# Altium PCB PCB2.PcbDoc
Units mm, origin at the board's own origin, x right, y up, seen from the top; angles counter-clockwise.
Board outline 159.89 x 71.5 mm, 2 copper layers (Top Layer, Bottom Layer); 21 components, 42 nets, 178 pads, 6 vias.
Unrouted connection lines stored in the file: 71.
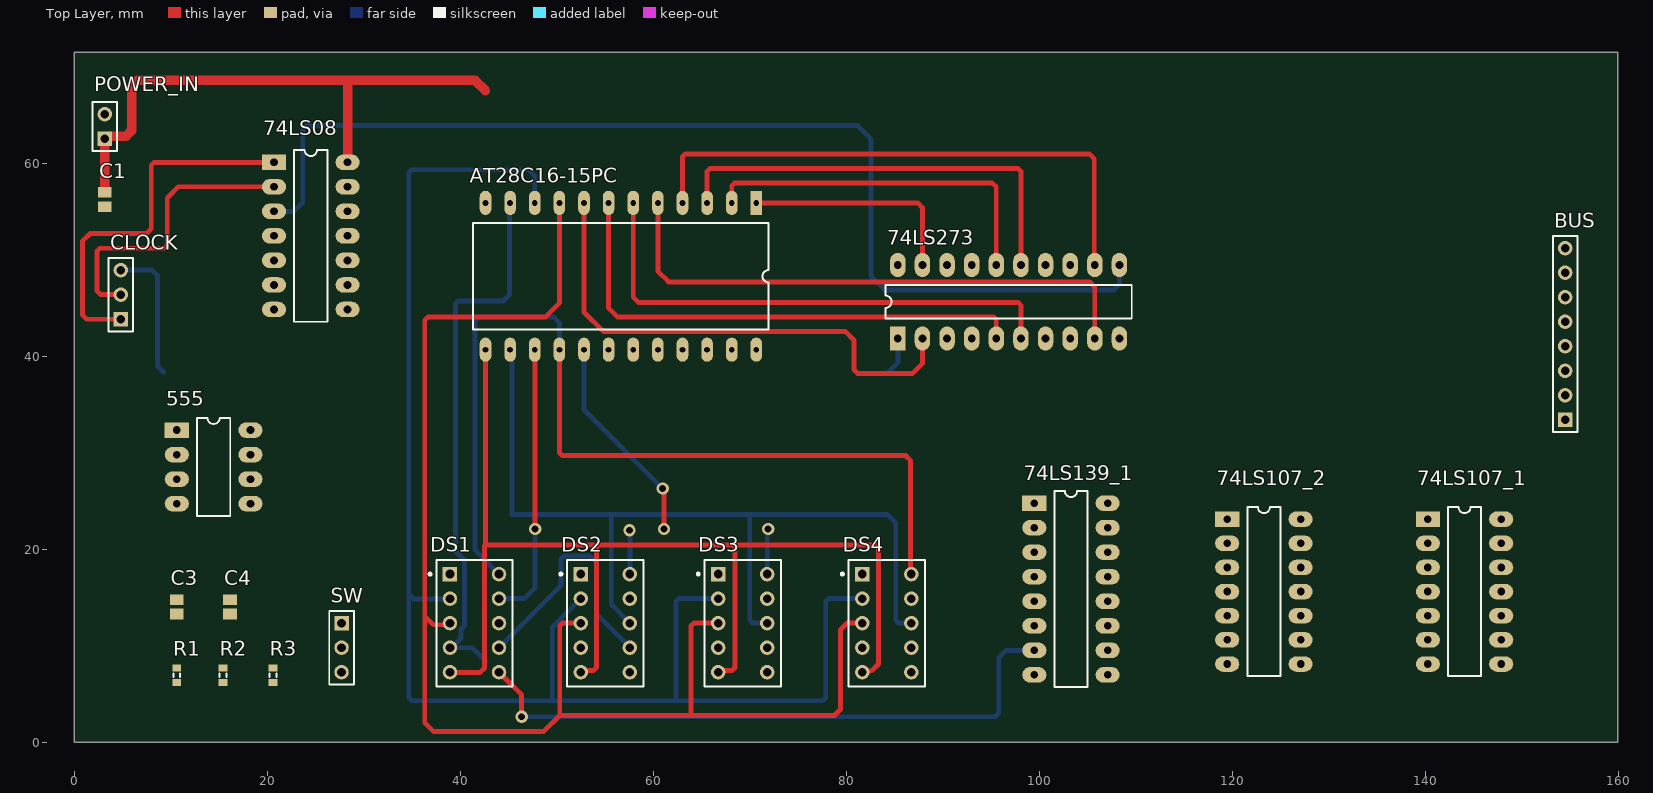
[diagram p0: Top Layer view]
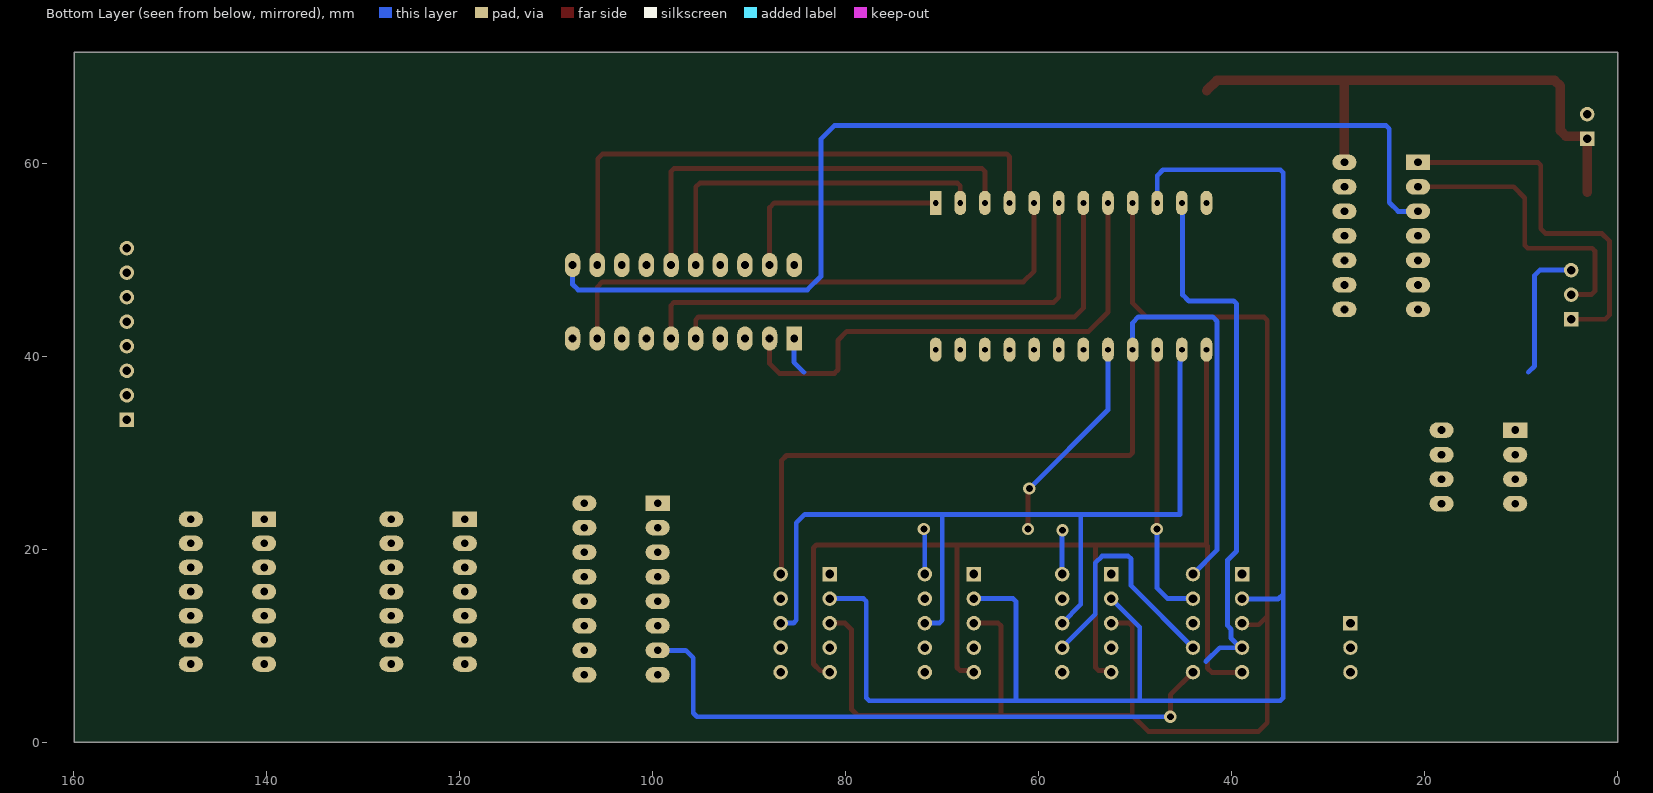
[diagram p1: Bottom Layer view, seen from below]

## Layer stack, top to bottom
Top Solder: solder mask 0.0102, Solder Resist, Dk 3.5
Top Layer: signal copper 0.0356
Dielectric 1: dielectric 0.32, FR-4, Dk 4.8
Bottom Layer: signal copper 0.0356
Bottom Solder: solder mask 0.0102, Solder Resist, Dk 3.5

## Board outline
0,0 159.893,0 159.893,71.501 0,71.501

## Design rules (kind name [scope] priority, off if disabled: settings)
Clearance [All] p1: gap=0.254 ignorepadtopadclearanceinfootprint=FALSE except(0: Arc-Hole Track-Hole SMDPad-Hole THPad-Hole Via-Hole Fill-Hole Poly-Hole Region-Hole Text-Hole; 0.245: Arc-SMDPad Track-SMDPad; 1: Arc-Arc Arc-Track Track-Track)
PolygonConnect [All] p1: connectstyle=Relief reliefconductorwidth=0.254 reliefentries=4 polygonreliefangle="90 Angle" airgapwidth=0.254
RoutingVias [All] p1: holewidth=0.711 width=1.27 viastyle="Through Hole" minholewidth=0.711 minwidth=1.27 maxholewidth=0.711 maxwidth=1.27
SolderMaskExpansion [All] p1: expansion=0.102 istentingtop=FALSE
Width VCC [InNet('VCC')] p1: maxlimit=2 minlimit=1 preferedwidth=1
Width GND [InNet('GND')] p2: maxlimit=2 minlimit=1 preferedwidth=1
Width [All] p3: maxlimit=1 minlimit=0.5 preferedwidth=0.5
30 further rules are at their usual default settings.

## Components (designator, comment, footprint, x,y, rotation, side; value= is the part's Value field where it differs from the comment)
74LS08 "DM74LS08N" SN74LS08N 20.708,60.084 r0 top
74LS107_1 "SN74LS107AN" DM74LS107 140.205,23.122 r0 top
74LS107_2 "SN74LS107AN" DM74LS107 119.429,23.122 r0 top
74LS139_1 "SN74LS139AN" SN74LS139AN 99.446,24.78 r0 top
74LS273 "SN74LS273N" SN74LS273N 85.313,41.833 r90 top
555 "NE555P" LM555 10.642,32.35 r0 top
AT28C16-15PC "AT28C16-15PC" AT28C16-15PC 70.662,55.88 r270 top
BUS "Header 8" HDR1X8 154.423,33.414 r90 top
C1 "Cap Pol3" C0805 3.182,56.215 r270 top value=0.1uF
C3 "Cap Pol3" C0805 10.642,14.048 r270 top value=0.01uF
C4 "Cap Pol3" C0805 16.15,14.048 r270 top value=0.01uF
CLOCK "Header 3" HDR1X3 4.845,43.838 r90 top
DS1 "Dpy Red-CA" A 41.471,12.356 r0 top
DS2 "Dpy Red-CA" A 55.021,12.356 r0 top
DS3 "Dpy Red-CA" A 69.243,12.356 r0 top
DS4 "Dpy Red-CA" A 84.172,12.356 r0 top
POWER_IN "Header 2" HDR1X2 3.182,62.533 r90 top
R1 "Res3" J1-0603 10.642,6.956 r90 top value=1K
R2 "Res3" J1-0603 15.434,6.956 r90 top value=100K
R3 "Res3" J1-0603 20.612,6.956 r270 top value=1K
SW "Header 3" HDR1X3 27.702,12.356 r270 top

## Footprints (in the part's own frame and the unit in brackets; to place one, negate y for a bottom-side part, rotate by r counter-clockwise, add the part's x,y. Pads: shape width x height; smd on the part's side, far side on the other; paste and mask are expansions set on the pad)
A [mm] "LED, 7-Segment Display, 7.62 mm, RHD; 10 Leads; Row Space 5.08 mm; Pitch 2.54 mm"
  rect 1.5x1.5 hole 0.9: 1(-2.54,5.08)
  round 1.5 hole 0.9: 2(-2.54,2.54) 3(-2.54,0) 4(-2.54,-2.54) 5(-2.54,-5.08) 6(2.54,-5.08) 7(2.54,-2.54) 8(2.54,0) 9(2.54,2.54) 10(2.54,5.08)
  silkscreen extent -4.72,-6.55 3.95,6.55, body extent -3.95,-6.55 3.95,6.55, height 6.34
AT28C16-15PC [mm]
  rect 2.5x1.2 hole 0.6: 1(0,0)
  oval 2.5x1.2 hole 0.6: 2(0,-2.55) 3(0,-5.1) 4(0,-7.65) 5(0,-10.2) 6(0,-12.75) 7(0,-15.3) 8(0,-17.85) 9(0,-20.4) 10(0,-22.95) 11(0,-25.5) 12(0,-28.05) 13(15.2,-28.05) 14(15.2,-25.5) 15(15.2,-22.95) 16(15.2,-20.4) 17(15.2,-17.85) 18(15.2,-15.3) 19(15.2,-12.75) 20(15.2,-10.2) 21(15.2,-7.65) 22(15.2,-5.1) 23(15.2,-2.55) 24(15.2,0)
  silkscreen extent 2.08,-29.32 13.12,1.27, body extent 0.13,-29.91 15.37,2.73, height 6.29
C0805 [mm] "Chip Capacitor, Body 2.0x1.3mm, IPC High Density"
  rect 1.1x1.4 smd: 1(-0.75,0) 2(0.75,0)
  body extent -1.1,-0.72 1.1,0.72, height 1.4
DM74LS107 [mm]
  rect 2.5x1.6 / inner rect 2.5x1.2 / far side rect 2.5x1.6 hole 0.8: 1(0,0)
  oval 2.5x1.6 / inner oval 2.5x1.2 / far side oval 2.5x1.6 hole 0.8: 2(0,-2.5) 3(0,-5) 4(0,-7.5) 5(0,-10) 6(0,-12.5) 7(0,-15) 8(7.6,-15) 9(7.6,-12.5) 10(7.6,-10) 11(7.6,-7.5) 12(7.6,-5) 13(7.6,-2.5) 14(7.6,0)
  silkscreen extent 2.08,-16.25 5.52,1.25, body extent -0.12,-17.49 7.75,2.51, height 5.6
HDR1X2 [mm] "Connector; Header; 2 Position"
  rect 1.5x1.5 hole 0.9: 1(0,0)
  round 1.5 hole 0.9: 2(2.54,0)
  silkscreen extent -1.27,-1.27 3.81,1.27
HDR1X3 [mm] "Connector; Header; 3 Position"
  rect 1.5x1.5 hole 0.9: 1(0,0)
  round 1.5 hole 0.9: 2(2.54,0) 3(5.08,0)
  silkscreen extent -1.27,-1.27 6.35,1.27
HDR1X8 [mm] "Connector; Header; 8 Position"
  rect 1.5x1.5 hole 0.9: 1(0,0)
  round 1.5 hole 0.9: 2(2.54,0) 3(5.08,0) 4(7.62,0) 5(10.16,0) 6(12.7,0) 7(15.24,0) 8(17.78,0)
  silkscreen extent -1.27,-1.27 19.05,1.27
J1-0603 [mm] "Chip Resistor, Body 1.6x0.8mm, IPC High Density"
  rect 0.7x0.9 smd: 1(-0.75,0) 2(0.75,0)
  silkscreen extent -0.2,-0.35 0.2,0.35, body extent -0.85,-0.48 0.85,0.48, height 0.9
LM555 [mm]
  rect 2.5x1.6 hole 0.8: 1(0,0)
  oval 2.5x1.6 hole 0.8: 2(0,-2.54) 3(0,-5.08) 4(0,-7.62) 5(7.62,-7.62) 6(7.62,-5.08) 7(7.62,-2.54) 8(7.62,0)
  silkscreen extent 2.08,-8.89 5.54,1.27, body extent -0.25,-9.65 14.6,1.78, height 4.69
SN74LS08N [mm]
  rect 2.5x1.6 hole 0.8: 1(0,0)
  oval 2.5x1.6 hole 0.8: 2(0,-2.54) 3(0,-5.08) 4(0,-7.62) 5(0,-10.16) 6(0,-12.7) 7(0,-15.24) 8(7.62,-15.24) 9(7.62,-12.7) 10(7.62,-10.16) 11(7.62,-7.62) 12(7.62,-5.08) 13(7.62,-2.54) 14(7.62,0)
  silkscreen extent 2.08,-16.51 5.54,1.27, body extent -0.19,-17.02 11.18,2.03, height 4.51
SN74LS139AN [mm]
  rect 2.5x1.6 / inner rect 2.5x1.2 / far side rect 2.5x1.6 hole 0.8: 1(0,0)
  oval 2.5x1.6 / inner oval 2.5x1.2 / far side oval 2.5x1.6 hole 0.8: 2(0,-2.54) 3(0,-5.08) 4(0,-7.62) 5(0,-10.16) 6(0,-12.7) 7(0,-15.24) 8(0,-17.78) 9(7.6,-17.78) 10(7.6,-15.24) 11(7.6,-12.7) 12(7.6,-10.16) 13(7.6,-7.62) 14(7.6,-5.08) 15(7.6,-2.54) 16(7.6,0)
  silkscreen extent 2.08,-19.05 5.52,1.27, body extent -0.25,-19.05 7.62,0.95, height 5.6
SN74LS273N [mm]
  rect 2.5x1.6 hole 0.8: 1(0,0)
  oval 2.5x1.6 hole 0.8: 2(0,-2.55) 3(0,-5.1) 4(0,-7.65) 5(0,-10.2) 6(0,-12.75) 7(0,-15.3) 8(0,-17.85) 9(0,-20.4) 10(0,-22.95) 11(7.62,-22.95) 12(7.62,-20.4) 13(7.62,-17.85) 14(7.62,-15.3) 15(7.62,-12.75) 16(7.62,-10.2) 17(7.62,-7.65) 18(7.62,-5.1) 19(7.62,-2.55) 20(7.62,0)
  silkscreen extent 2.08,-24.22 5.54,1.27, body extent 0,-23.73 7.87,0.87, height 4.86

## Part data
74LS08: "IC GATE AND 4CH 2-INP 14-DIP", Case/Package=DIP, High Level Output Current=-400uA, Low Level Output Current=8mA, Manufacturer="ON Semiconductor / Fairchild", Max Operating Temperature=70°C, Max Supply Voltage=5.25V, Min Operating Temperature=0°C, Min Supply Voltage=4.75V, Package Quantity=25, Supplier Part Number 1=512-DM74LS08N, Category="Logic Gates", ComponentLink1Description=https://datasheet.ciiva.com/4825/74ls08-196234-4825713.pdf?src-supplier=Mouser, ComponentLink1URL=https://datasheet.ciiva.com/4825/74ls08-196234-4825713.pdf?src-supplier=Mouser, ComponentLink2Description=https://datasheet.ciiva.com/1877/dm74ls08-1877307.pdf?src-supplier=Digi-Key, ComponentLink2URL=https://datasheet.ciiva.com/1877/dm74ls08-1877307.pdf?src-supplier=Digi-Key, Lead Free="Contains Lead", Logic Function=AND, Manufacturer Part Number=DM74LS08N, Mount="Through Hole", Number of Circuits=4, Number of Gates=4, Number of Inputs=2, Number of Pins=14, Packaging=Rail/Tube, Propagation Delay=18ns, RoHS=Yes, Supplier 1=Mouser
74LS107_1 74LS107_2: "Flip Flop JK-Type Neg-Edge 2-Element 14-Pin PDIP Tube", Case/Package=PDIP, Frequency=45MHz, High Level Output Current=-400uA, Low Level Output Current=8mA, Manufacturer="Texas Instruments", Max Operating Temperature=70°C, Max Supply Voltage=5.25V, Min Operating Temperature=0°C, Min Supply Voltage=4.75V, Nominal Supply Current=100uA, Operating Supply Voltage=5V, Package Quantity=25, Supplier Part Number 1=95M4428, Clock Edge Trigger Type="Negative Edge,Positive Edge", ComponentLink1Description=https://www.distrelec.biz/Web/Downloads/_t/ds/sn74ls107a_eng_tds.pdf?mime=application%2Fpdf&src-supplier=Distrelec, ComponentLink1URL=https://www.distrelec.biz/Web/Downloads/_t/ds/sn74ls107a_eng_tds.pdf?mime=application%2Fpdf&src-supplier=Distrelec, ComponentLink2Description=http://focus.ti.com/lit/ds/symlink/sn74107.pdf?src-supplier=Avnet+Europe, ComponentLink2URL=http://focus.ti.com/lit/ds/symlink/sn74107.pdf?src-supplier=Avnet+Europe, ComponentLink3Description=http://www.ti.com/general/docs/lit/getliterature.tsp?genericPartNumber=SN74LS107A&&fileType=pdf&src-supplier=Avnet, ComponentLink3URL=http://www.ti.com/general/docs/lit/getliterature.tsp?genericPartNumber=SN74LS107A&&fileType=pdf&src-supplier=Avnet, ComponentLink4Description=https://source.z2data.com/2016/10/12/6/26/54/563/639426/sn74107.pdf?src-supplier=Digi-Key, ComponentLink4URL=https://source.z2data.com/2016/10/12/6/26/54/563/639426/sn74107.pdf?src-supplier=Digi-Key, ComponentLink5Description=http://www.farnell.com/datasheets/1967736.pdf?src-supplier=Element14, ComponentLink5URL=http://www.farnell.com/datasheets/1967736.pdf?src-supplier=Element14, ComponentLink6Description=https://www.verical.com/server-webapp/html/getDatasheet?partID=250176&src-supplier=Verical, ComponentLink6URL=https://www.verical.com/server-webapp/html/getDatasheet?partID=250176&src-supplier=Verical, Height=4.57mm, Lead Free="Lead Free", Length=19.69mm, Logic Function=Flip-Flop,JK-Type, Manufacturer Part Number=SN74LS107AN, Max Frequency=45MHz, Mount="Through Hole", Number of Bits=2, Number of Bits per Element=1, Number of Circuits=2, Number of Elements=2, Number of Input Lines=4, Number of Output Lines=2, Number of Pins=14, Output Current=8mA, Output Type=TTL, Packaging=Rail/Tube, Polarity=Non-Inverting, Propagation Delay=20ns, Radiation Hardening=No, REACH SVHC="No SVHC", Stock 1=0, Supplier 1=Newark, Turn-On Delay Time=15ns, Weight=0.032734oz, Width=6.6mm
74LS139_1: "TEXAS INSTRUMENTS         SN74LS139AN            IC, DECODER/DEMUX, 74LS139", Case/Package=PDIP, High Level Output Current=-400uA, Low Level Output Current=8mA, Manufacturer="Texas Instruments", Max Operating Temperature=70°C, Max Power Dissipation=200mW, Max Supply Voltage=5.25V, Min Operating Temperature=0°C, Min Supply Voltage=4.75V, Nominal Supply Current=100uA, Operating Supply Voltage=5V, Package Quantity=25, Supplier Part Number 1=308253, Bandwidth=35MHz, ComponentLink1Description=http://www.farnell.com/datasheets/2018724.pdf?src-supplier=Element14, ComponentLink1URL=http://www.farnell.com/datasheets/2018724.pdf?src-supplier=Element14, ComponentLink2Description=https://www.distrelec.biz/Web/Downloads/57/06/lm645706.pdf?mime=application%2Fpdf&src-supplier=Distrelec, ComponentLink2URL=https://www.distrelec.biz/Web/Downloads/57/06/lm645706.pdf?mime=application%2Fpdf&src-supplier=Distrelec, ComponentLink3Description=http://www.ti.com/lit/ds/symlink/sn74s139a.pdf?src-supplier=Digi-Key, ComponentLink3URL=http://www.ti.com/lit/ds/symlink/sn74s139a.pdf?src-supplier=Digi-Key, ComponentLink4Description=https://www.verical.com/server-webapp/html/getDatasheet?partID=83287&src-supplier=Verical, ComponentLink4URL=https://www.verical.com/server-webapp/html/getDatasheet?partID=83287&src-supplier=Verical, Height=4.57mm, Independent Circuits=2, Lead Free="Lead Free", Length=19.3mm, Logic Function=Demultiplexer,Decoder, Manufacturer Part Number=SN74LS139AN, Mount="Through Hole", Number of Bits=4, Number of Channels=2, Number of Circuits=2, Number of Elements=2, Number of Input Lines=2, Number of Inputs=2, Number of Output Lines=4, Number of Outputs=4, Number of Pins=16, Packaging=Rail/Tube, Polarity=Inverting, Propagation Delay=33ns, Radiation Hardening=No, REACH SVHC="No SVHC", Stock 1=0, Supplier 1=RSComponents, Supply Type=Single, Throw Configuration=DP4T, Turn-On Delay Time=38ns, Weight=0.03357oz, Width=6.35mm
74LS273: "IC D-TYPE POS TRG SNGL 20DIP", Case/Package=PDIP, Frequency=40MHz, High Level Output Current=-400uA, Low Level Output Current=8mA, Manufacturer="Texas Instruments", Max Operating Temperature=70°C, Max Supply Voltage=5.25V, Min Operating Temperature=0°C, Min Supply Voltage=4.75V, Operating Supply Voltage=5V, Package Quantity=20, Supplier Part Number 1=0308354, Clock Edge Trigger Type="Positive Edge", ComponentLink1Description=https://www.distrelec.biz/Web/Downloads/14/_e/kg645614_E.pdf?mime=application%2Fpdf&src-supplier=Distrelec, ComponentLink1URL=https://www.distrelec.biz/Web/Downloads/14/_e/kg645614_E.pdf?mime=application%2Fpdf&src-supplier=Distrelec, ComponentLink2Description=http://focus.ti.com/lit/ds/symlink/sn74273.pdf?src-supplier=Avnet+Europe, ComponentLink2URL=http://focus.ti.com/lit/ds/symlink/sn74273.pdf?src-supplier=Avnet+Europe, ComponentLink3Description=http://www.ti.com/lit/ds/symlink/sn74ls273.pdf?src-supplier=Digi-Key, ComponentLink3URL=http://www.ti.com/lit/ds/symlink/sn74ls273.pdf?src-supplier=Digi-Key, ComponentLink4Description=https://www.verical.com/server-webapp/html/getDatasheet?partID=250181&src-supplier=Verical, ComponentLink4URL=https://www.verical.com/server-webapp/html/getDatasheet?partID=250181&src-supplier=Verical, ComponentLink5Description=http://datasheet.iiic.cc/texas_instruments/SN74LS273N.pdf?src-supplier=IIIC, ComponentLink5URL=http://datasheet.iiic.cc/texas_instruments/SN74LS273N.pdf?src-supplier=IIIC, ComponentLink6Description=http://www.produktinfo.conrad.com/datenblaetter/175000-199999/175129-da-01-en-LOGIK_IC_SN_74_LS_273_N_DIP20__TID.pdf?src-supplier=Conrad, ComponentLink6URL=http://www.produktinfo.conrad.com/datenblaetter/175000-199999/175129-da-01-en-LOGIK_IC_SN_74_LS_273_N_DIP20__TID.pdf?src-supplier=Conrad, ComponentLink7Description=http://www.produktinfo.conrad.com/datenblaetter/1000000-1099999/001016947-da-01-en-IC_DTPE_POS_TRG_S_SN74LS273N_PDIP_20_TID.pdf?src-supplier=Conrad, ComponentLink7URL=http://www.produktinfo.conrad.com/datenblaetter/1000000-1099999/001016947-da-01-en-IC_DTPE_POS_TRG_S_SN74LS273N_PDIP_20_TID.pdf?src-supplier=Conrad, Height=4.57mm, Lead Free="Contains Lead", Length=24.33mm, Logic Function=D-Type,Flip-Flop, Manufacturer Part Number=SN74LS273N, Max Frequency=40MHz, Mount="Through Hole", Number of Bits=8, Number of Bits per Element=8, Number of Channels=8, Number of Circuits=8, Number of Elements=1, Number of Input Lines=2, Number of Output Lines=1, Number of Pins=20, Output Current=8mA, Output Type=TTL, Packaging=Rail/Tube, Polarity=Non-Inverting, Propagation Delay=27ns, Radiation Hardening=No, REACH SVHC="No SVHC", Stock 1=0, Supplier 1=RSComponents, Turn-On Delay Time=17ns, Weight=0.042297oz, Width=6.35mm
555: "TEXAS INSTRUMENTS         NE555P            TIMER SINGLE PRECISION,DIP8 ,0.5MHZ", Case/Package=PDIP, Current Rating=10mA, Frequency=500kHz, High Level Output Current=-200mA, Low Level Output Current=200mA, Manufacturer="Texas Instruments", Max Operating Temperature=70°C, Max Supply Voltage=16V, Min Operating Temperature=0°C, Min Supply Voltage=4.5V, Nominal Supply Current=2mA, Operating Supply Voltage=5V, Package Quantity=50, Quiescent Current=15mA, Supplier Part Number 1=296-NE555P-ND, Category="Clock and Timing", ComponentLink1Description=https://datasheet.ciiva.com/19457/904085-19457361.pdf?src-supplier=Jameco, ComponentLink1URL=https://datasheet.ciiva.com/19457/904085-19457361.pdf?src-supplier=Jameco, ComponentLink2Description=https://datasheet.ciiva.com/1139/sa555-1139904.pdf?src-supplier=Element14, ComponentLink2URL=https://datasheet.ciiva.com/1139/sa555-1139904.pdf?src-supplier=Element14, ComponentLink3Description=https://datasheet.ciiva.com/26325/152184-da-01-en-ne555p-timer-tid-26325915.pdf?src-supplier=Conrad, ComponentLink3URL=https://datasheet.ciiva.com/26325/152184-da-01-en-ne555p-timer-tid-26325915.pdf?src-supplier=Conrad, ComponentLink4Description=https://datasheet.ciiva.com/1147/1764032-1147750.pdf?src-supplier=Newark, ComponentLink4URL=https://datasheet.ciiva.com/1147/1764032-1147750.pdf?src-supplier=Newark, ComponentLink5Description=https://datasheet.ciiva.com/14094/ne555-series-eng-tds-14094950.pdf?src-supplier=Distrelec, ComponentLink5URL=https://datasheet.ciiva.com/14094/ne555-series-eng-tds-14094950.pdf?src-supplier=Distrelec, ComponentLink6Description=https://datasheet.ciiva.com/14274/ne555-14274456.pdf?src-supplier=Avnet, ComponentLink6URL=https://datasheet.ciiva.com/14274/ne555-14274456.pdf?src-supplier=Avnet, ComponentLink7Description=https://datasheet.ciiva.com/15152/getdatasheetpartid-248510-15152620.pdf?src-supplier=Verical, ComponentLink7URL=https://datasheet.ciiva.com/15152/getdatasheetpartid-248510-15152620.pdf?src-supplier=Verical, ComponentLink8Description=https://datasheet.ciiva.com/1233/ne555-1233454.pdf?src-supplier=Digi-Key, ComponentLink8URL=https://datasheet.ciiva.com/1233/ne555-1233454.pdf?src-supplier=Digi-Key, ComponentLink9Description=https://datasheet.ciiva.com/26228/ne555-26228892.pdf?src-supplier=Avnet+Europe, ComponentLink9URL=https://datasheet.ciiva.com/26228/ne555-26228892.pdf?src-supplier=Avnet+Europe, Contact Plating=Gold, Height=4.57mm, Lead Free="Lead Free", Length=9.81mm, Manufacturer Part Number=NE555P, Mount="Through Hole", Number of Pins=8, Number of Timers/Counters=1, Operating Supply Current=10mA, Packaging=Rail/Tube, Pricing 1="1=0,45000, 10=0,34200, 25=0,30800, 100=0,21280, 250=0,17920, 500=0,14560, 1000=0,11200, 2500=0,10080, 5000=0,09520 (USD)", Radiation Hardening=No, REACH SVHC="No SVHC", RoHS=Yes, Stock 1=8033, Supplier 1=Digi-Key, Weight=0.015535oz, Width=6.35mm
AT28C16-15PC: Case/Package=DIP, Frequency=150GHz, Manufacturer="Microchip / Atmel", Max Operating Temperature=70°C, Max Supply Voltage=5.5V, Min Operating Temperature=0°C, Min Supply Voltage=4.5V, Nominal Supply Current=30mA, Operating Supply Voltage=5V, Package Quantity=16, Supplier Part Number 1=AT28C16-15PC-ND, Access Time=150ns, ComponentLink1Description=http://www.atmel.com/Images/doc0540.pdf?src-supplier=Digi-Key, ComponentLink1URL=http://www.atmel.com/Images/doc0540.pdf?src-supplier=Digi-Key, ComponentLink2Description=http://components.arrow.com/part/dataview/66884S2427492N3744?src-supplier=Arrow, ComponentLink2URL=http://components.arrow.com/part/dataview/66884S2427492N3744?src-supplier=Arrow, Density=16Kb, Interface=Parallel, Lead Free="Contains Lead", Manufacturer Part Number=AT28C16-15PC, Memory Size=16Kb, Memory Type=EEPROM, Mount="Through Hole", Number of Pins=24, Packaging=Rail/Tube, Stock 1=0, Supplier 1=Digi-Key
BUS: "Header, 8-Pin", LatestRevisionDate=17-Jul-2002, LatestRevisionNote="Re-released for DXP Platform.", Publisher="Altium Limited"
C1 C3 C4: "Polarized Capacitor (Surface Mount)", LatestRevisionDate=29-May-2009, LatestRevisionNote="IPC-7351 Footprint Added.", PackageDescription="Chip Capacitor", PackageReference=C0805, Published=8-Jun-2000, Publisher="Altium Limited"
CLOCK SW: "Header, 3-Pin", LatestRevisionDate=17-Jul-2002, LatestRevisionNote="Re-released for DXP Platform.", Publisher="Altium Limited"
DS1 DS2 DS3 DS4: "7.62 mm Black Surface HER 7-Segment Display: CA, RH DP", Colour="High Efficiency Red (HER)", ComponentLink1Description="Manufacturer Link", ComponentLink1URL=http://www.agilent.com/, DatasheetVersion=19-Feb-2002, LatestRevisionDate=17-Dec-2003, LatestRevisionNote="Schematic revised, PCB Footprint replaced.", MinimumIntensity="360 ucd", Note="IF = 5 mA", PackageDescription="LED, 7-Segment Display, 7.62 mm, RHD; 10 Leads; Row Space 5.08 mm; Pitch 2.54 mm", PackageReference=A, PackageVersion=11-Feb-2002, Published=8-Jun-2000, Publisher="Altium Limited"
POWER_IN: "Header, 2-Pin", LatestRevisionDate=17-Jul-2002, LatestRevisionNote="Re-released for DXP Platform.", Publisher="Altium Limited"
R1 R2 R3: "Resistor", LatestRevisionDate=29-May-2009, LatestRevisionNote="IPC-7351 Footprint Added.", PackageDescription="Chip Resistor", PackageReference=J1-0603, Published=8-Jun-2000, Publisher="Altium Limited"

## Via types
v1: diameter 1.27, hole 0.711, Top Layer to Bottom Layer, 6 vias

## Nets (pads, with @x,y where several pads share a name; then routed paths per layer and width w, separated by ;. In a path a pad name is that pad's centre, name@x,y a point inside that pad or via, vN(x,y) a via of type N, cw(c..) or ccw(c..) an arc to the next point about the centre after c; other vN are vias at no path point)
GND: 74LS08.7 74LS107_1.7 74LS107_2.7 74LS139_1.1 74LS139_1.8 74LS273.10 555.1 AT28C16-15PC.12 AT28C16-15PC.18 AT28C16-15PC.20 C1.2 C3.2 C4.2 POWER_IN.2 R3.2
Net74LS08_1: 74LS08.1 CLOCK.1 | length 38.9
  Top Layer w0.5: CLOCK.1 1.293,43.838 0.889,44.242 0.889,51.943 1.651,52.705 7.493,52.705 8.001,53.213 8.001,59.778 8.294,60.071 20.695,60.071 74LS08.1 74LS08.1@20.679,60.113
Net74LS08_2: 74LS08.2 CLOCK.2 | length 30.9
  Top Layer w0.5: CLOCK.2 2.747,46.378 2.389,46.736 2.389,50.888 2.682,51.181 9.359,51.181 9.652,51.474 9.652,56.388 10.808,57.544 74LS08.2 74LS08.2@20.556,57.392
Net74LS08_3: 74LS08.3 74LS273.11 | length 113.4
  Bottom Layer w0.5: 74LS08.3 22.77,55.004 23.688,55.922 23.688,63.566 24.003,63.881 81.153,63.881 82.55,62.484 82.55,48.26 83.947,46.863 107.696,46.863 108.263,47.43 74LS273.11 74LS273.11@108.204,49.512
Net74LS107_1_2: 74LS107_1.2 74LS107_2.9 74LS139_1.2 AT28C16-15PC.23
Net74LS107_1_12: 74LS107_1.12 555.3
Net74LS107_2_6: 74LS107_2.6 74LS139_1.3 AT28C16-15PC.22
Net74LS139_1_4: 74LS139_1.4 DS4.1 DS4.6
Net74LS139_1_5: 74LS139_1.5 DS3.1 DS3.6
Net74LS139_1_6: 74LS139_1.6 DS2.1 DS2.6
Net74LS139_1_7: 74LS139_1.7 DS1.1 DS1.6 | length 64.9
  Top Layer w0.5: DS1.6 46.355,4.933 v1(46.355,2.667)
  Bottom Layer w0.5: v1(46.355,2.667) 95.377,2.667 95.758,3.048 95.758,8.763 96.535,9.54 74LS139_1.7
Net74LS273_1: 74LS273.1 CLOCK.3 | length 18.3
  Bottom Layer w0.5: CLOCK.3 8.105,48.918 8.636,48.387 8.636,38.989 9.29,38.335 ; 84.309,38.335 85.344,39.37 85.344,41.802 74LS273.1
Net74LS273_2: 74LS273.2 AT28C16-15PC.8 | length 53.8
  Top Layer w0.5: AT28C16-15PC.8 52.812,44.557 54.8,42.569 79.859,42.569 80.772,41.656 80.772,38.608 81.153,38.227 86.868,38.227 87.863,39.222 74LS273.2
Net74LS273_3: 74LS273.3 BUS.1
Net74LS273_4: 74LS273.4 BUS.2
Net74LS273_5: 74LS273.5 AT28C16-15PC.7 | length 53.5
  Top Layer w0.5: AT28C16-15PC.7 55.362,44.968 56.261,44.069 95.22,44.069 95.513,43.776 74LS273.5
Net74LS273_6: 74LS273.6 AT28C16-15PC.6 | length 53.7
  Top Layer w0.5: AT28C16-15PC.6 57.912,46.101 58.444,45.569 97.77,45.569 98.063,45.276 74LS273.6
Net74LS273_7: 74LS273.7 BUS.3
Net74LS273_8: 74LS273.8 BUS.4
Net74LS273_9: 74LS273.9 AT28C16-15PC.5 | length 58.3
  Top Layer w0.5: AT28C16-15PC.5 60.462,48.807 61.57,47.699 105.172,47.699 105.713,47.159 74LS273.9
Net74LS273_12: 74LS273.12 AT28C16-15PC.4 | length 58.8
  Top Layer w0.5: AT28C16-15PC.4 63.012,60.667 63.305,60.96 105.156,60.96 105.664,60.452 105.664,49.502 74LS273.12
Net74LS273_13: 74LS273.13 BUS.5
Net74LS273_14: 74LS273.14 BUS.6
Net74LS273_15: 74LS273.15 AT28C16-15PC.3 | length 45.7
  Top Layer w0.5: AT28C16-15PC.3 65.562,59.143 65.855,59.436 97.77,59.436 98.063,59.143 74LS273.15
Net74LS273_16: 74LS273.16 AT28C16-15PC.2 | length 37.5
  Top Layer w0.5: AT28C16-15PC.2 68.112,57.643 68.405,57.936 95.099,57.936 95.504,57.531 95.504,49.462 74LS273.16
Net74LS273_17: 74LS273.17 BUS.7
Net74LS273_18: 74LS273.18 BUS.8
Net74LS273_19: 74LS273.19 AT28C16-15PC.1 | length 23.3
  Top Layer w0.5: AT28C16-15PC.1 87.376,55.88 87.863,55.393 74LS273.19
Net555_2: 555.2 555.6 C3.1 R2.2
Net555_5: 555.5 C4.1
Net555_7: 555.7 R1.1 R2.1
NetAT28C16-15PC_9: AT28C16-15PC.9 DS1.3 DS2.3 DS3.3 DS4.3 | length 148.7
  Top Layer w0.5: DS1.3 38.767,12.192 37.211,12.192 36.322,13.081 ; AT28C16-15PC.9 50.262,45.496 48.835,44.069 36.665,44.069 36.322,43.726 36.322,13.081 ; DS2.3 50.585,12.356 50.292,12.064 50.292,2.794 ; DS3.3 64.174,12.356 63.881,12.064 63.881,2.794 ; DS4.3 80.047,12.356 79.375,11.684 79.375,3.429 78.74,2.794 63.881,2.794 ; 36.322,13.081 36.322,2.032 37.211,1.143 48.641,1.143 50.292,2.794 ; 50.292,2.794 63.881,2.794
NetAT28C16-15PC_10: AT28C16-15PC.10 DS1.2 DS2.2 DS3.2 DS4.2 | length 159
  Bottom Layer w0.5: DS1.2 38.894,14.859 35.179,14.859 34.671,15.367 ; AT28C16-15PC.10 47.712,58.714 47.117,59.309 34.964,59.309 34.671,59.016 34.671,15.367 ; DS2.2 49.53,11.946 49.53,4.318 ; DS3.2 62.65,14.896 62.357,14.604 62.357,4.318 ; DS4.2 78.144,14.896 77.851,14.604 77.851,4.611 77.558,4.318 62.357,4.318 ; 34.671,15.367 34.671,4.611 34.964,4.318 49.53,4.318 ; 49.53,4.318 62.357,4.318
NetAT28C16-15PC_11: AT28C16-15PC.11 DS1.4 DS2.4 DS3.4 DS4.4 | length 56.4
  Bottom Layer w0.5: DS1.4 DS1.4@39.095,9.816 ; 42.672,8.382 41.238,9.816 DS1.4@39.095,9.816 ; AT28C16-15PC.11 45.085,55.803 45.085,46.355 44.45,45.72 39.79,45.72 39.497,45.427 39.497,19.829 40.431,18.895 40.431,12.083 40.074,11.726 40.074,10.795 DS1.4@39.095,9.816
NetAT28C16-15PC_13: AT28C16-15PC.13 DS1.5 DS2.5 DS3.5 DS4.5 | length 120.8
  Top Layer w0.5: DS1.5 38.969,7.239 42.037,7.239 42.511,7.713 42.511,20.346 42.612,20.447 ; AT28C16-15PC.13 42.612,20.447 ; DS2.5 52.672,7.468 53.809,7.468 54.102,7.761 54.102,20.447 ; DS3.5 66.894,7.468 68.16,7.468 68.453,7.761 68.453,20.447 ; DS4.5 81.779,7.423 82.607,7.423 83.312,8.128 83.312,20.154 83.019,20.447 68.453,20.447 ; 42.612,20.447 54.102,20.447 ; 54.102,20.447 68.453,20.447
NetAT28C16-15PC_14: AT28C16-15PC.14 DS1.8 DS2.8 DS3.8 DS4.8 | length 94
  Bottom Layer w0.5: AT28C16-15PC.14 45.296,40.546 45.296,39.43 45.339,39.387 45.339,23.613 55.626,23.613 ; DS2.8 55.626,14.291 55.626,23.613 ; DS3.8 70.27,12.356 69.977,12.649 69.977,23.613 ; DS4.8 85.383,12.356 85.09,12.649 85.09,22.733 84.21,23.613 69.977,23.613 ; 55.626,23.613 69.977,23.613
NetAT28C16-15PC_15: AT28C16-15PC.15 DS1.9 DS2.9 DS3.9 DS4.9 | length 28.9
  Top Layer w0.5: AT28C16-15PC.15 47.752,40.64 v1(47.752,22.098)
  Bottom Layer w0.5: DS1.9 46.646,14.896 47.752,16.002 v1(47.752,22.098)
NetAT28C16-15PC_16: AT28C16-15PC.16 DS1.10 DS2.10 DS3.10 DS4.10 | length 107.6
  Top Layer w0.5: AT28C16-15PC.16 50.262,30.011 50.555,29.718 86.106,29.718 86.614,29.21 86.614,17.535 DS4.10
  Bottom Layer w0.5: DS1.10 41.508,19.94 41.508,43.599 41.978,44.069 49.657,44.069 50.262,43.464 AT28C16-15PC.16 ; v1(57.531,21.971) 57.561,21.941 DS2.10 ; DS3.10 71.783,21.999 v1(71.882,22.098)
NetAT28C16-15PC_17: AT28C16-15PC.17 DS1.7 DS2.7 DS3.7 DS4.7 | length 48.2
  Top Layer w0.5: v1(60.96,26.289) 61.087,26.162 v1(61.087,22.098)
  Bottom Layer w0.5: DS1.7 50.419,16.224 50.419,19.011 50.712,19.304 53.428,19.304 54.126,18.606 54.126,13.287 57.561,9.852 DS2.7 ; AT28C16-15PC.17 52.812,34.437 v1(60.96,26.289)
NetAT28C16-15PC_19: AT28C16-15PC.19 SW.2
NetR3_1: R3.1 SW.1
VCC: 74LS08.14 74LS107_1.1 74LS107_1.4 74LS107_1.13 74LS107_1.14 74LS107_2.8 74LS107_2.10 74LS107_2.11 74LS107_2.14 74LS139_1.16 74LS273.20 555.8 AT28C16-15PC.21 AT28C16-15PC.24 C1.1 POWER_IN.1 R1.2 SW.3 | length 59.1
  Top Layer w1: C1.1 POWER_IN.1 3.432,62.783 5.383,62.783 5.969,63.369 5.969,67.994 6.555,68.58 28.321,68.58 ; 74LS08.14 28.328,68.573 28.321,68.58 ; 42.602,67.507 41.529,68.58 28.321,68.58
pads on no net: 74LS08.4 74LS08.5 74LS08.6 74LS08.8 74LS08.9 74LS08.10 74LS08.11 74LS08.12 74LS08.13 74LS107_1.3 74LS107_1.5 74LS107_1.6 74LS107_1.8 74LS107_1.9 74LS107_1.10 74LS107_1.11 74LS107_2.1 74LS107_2.2 74LS107_2.3 74LS107_2.4 74LS107_2.5 74LS107_2.12 74LS107_2.13 74LS139_1.9 74LS139_1.10 74LS139_1.11 74LS139_1.12 74LS139_1.13 74LS139_1.14 74LS139_1.15 555.4